# Altium PCB 001-03 ПП.PcbDoc
Units mm, origin at the board's own origin, x right, y up, seen from the top; angles counter-clockwise.
Board outline 91 x 91 mm, 4 copper layers (TOP, INT1, INT2, BOT), stack 1.131 mm thick; 32 components, 30 nets, 70 pads, 32 vias.
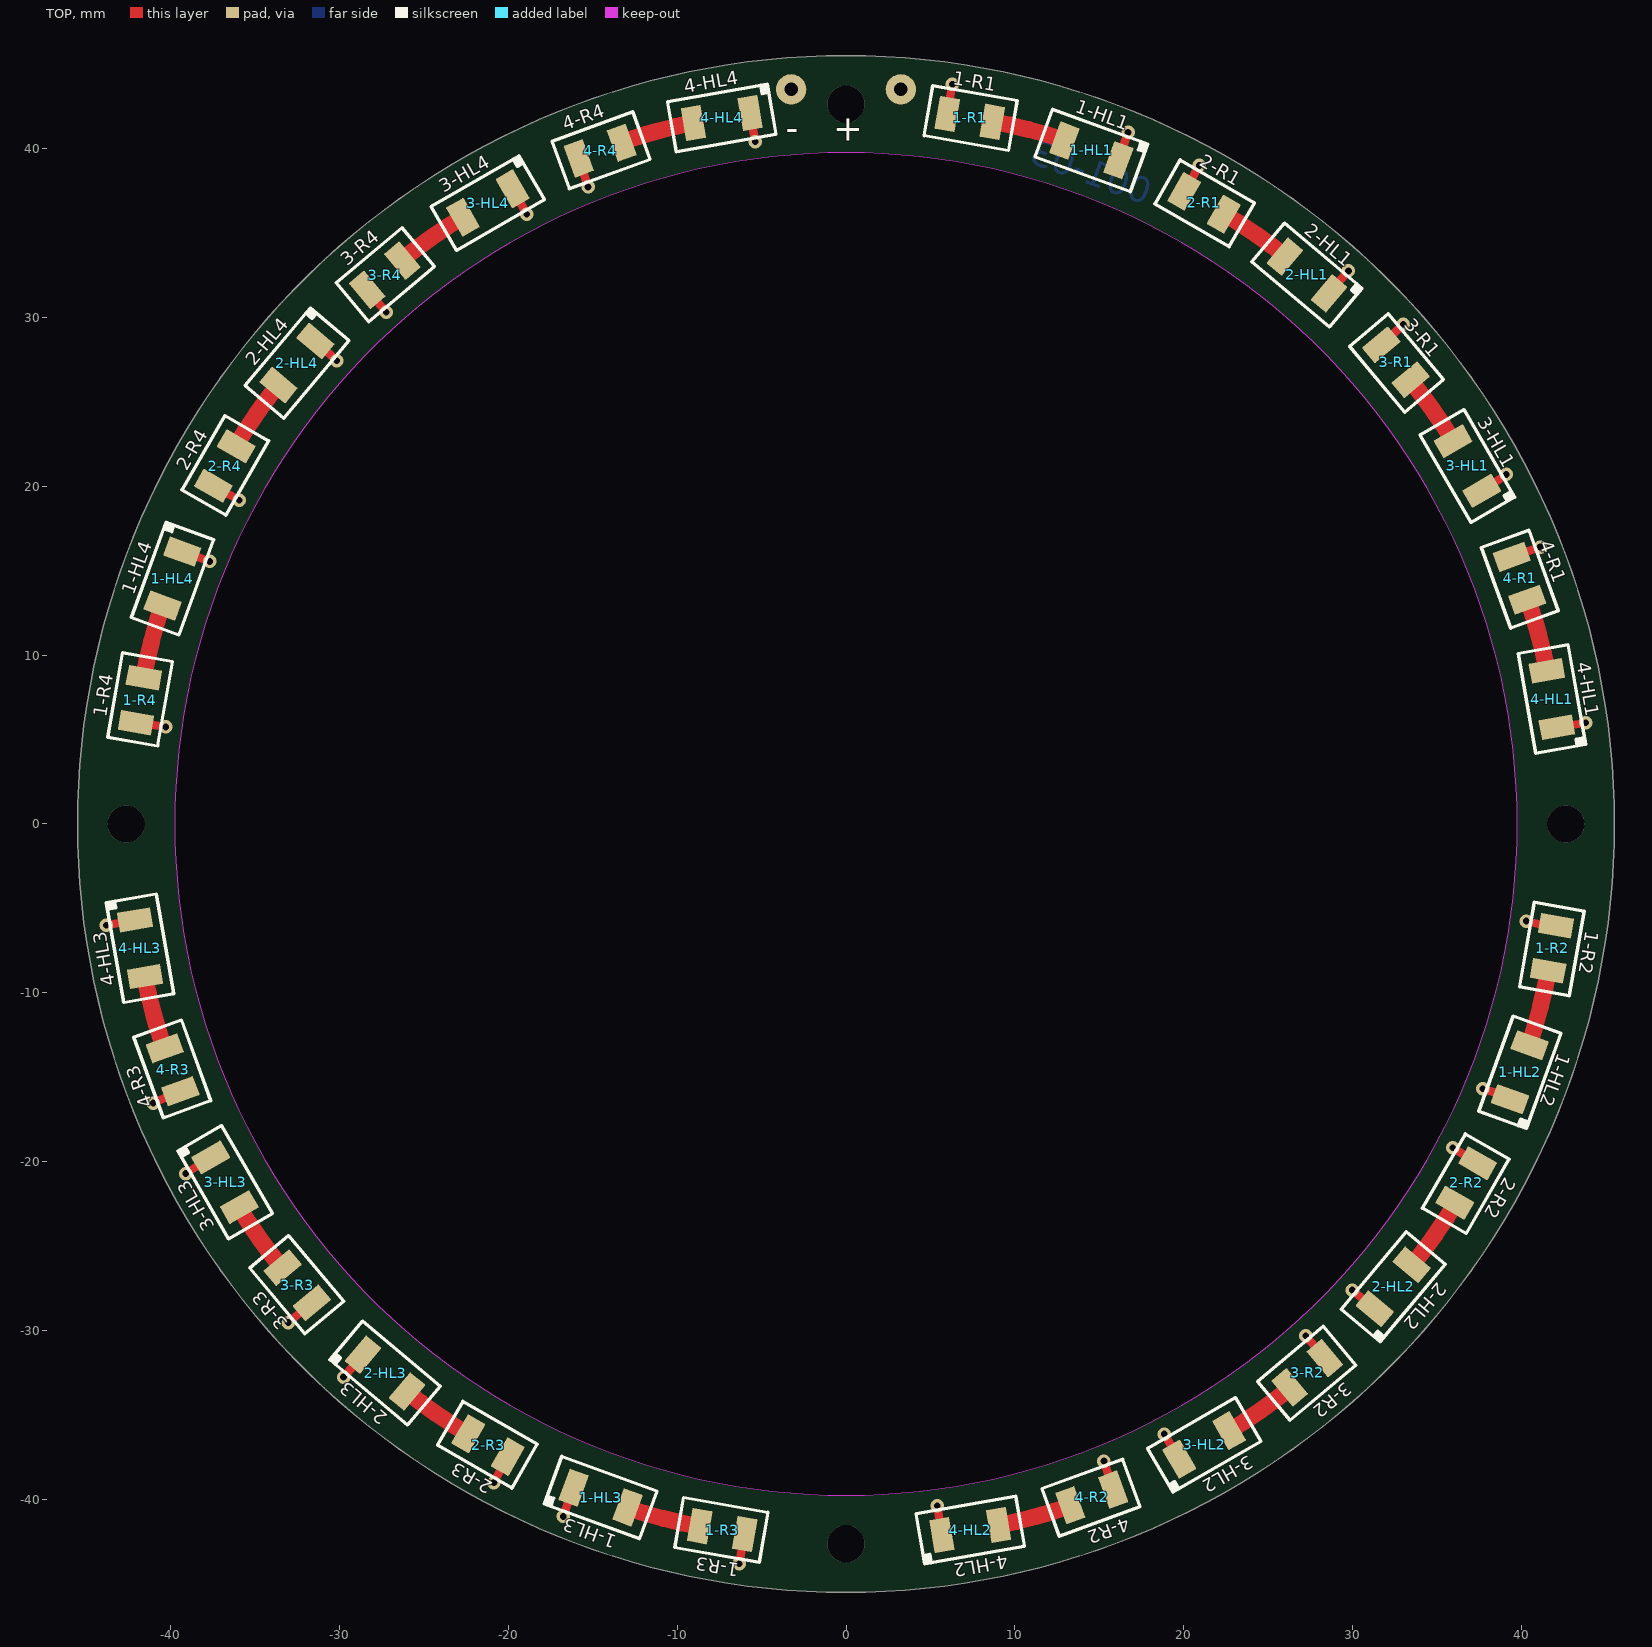
[diagram p0: TOP view]
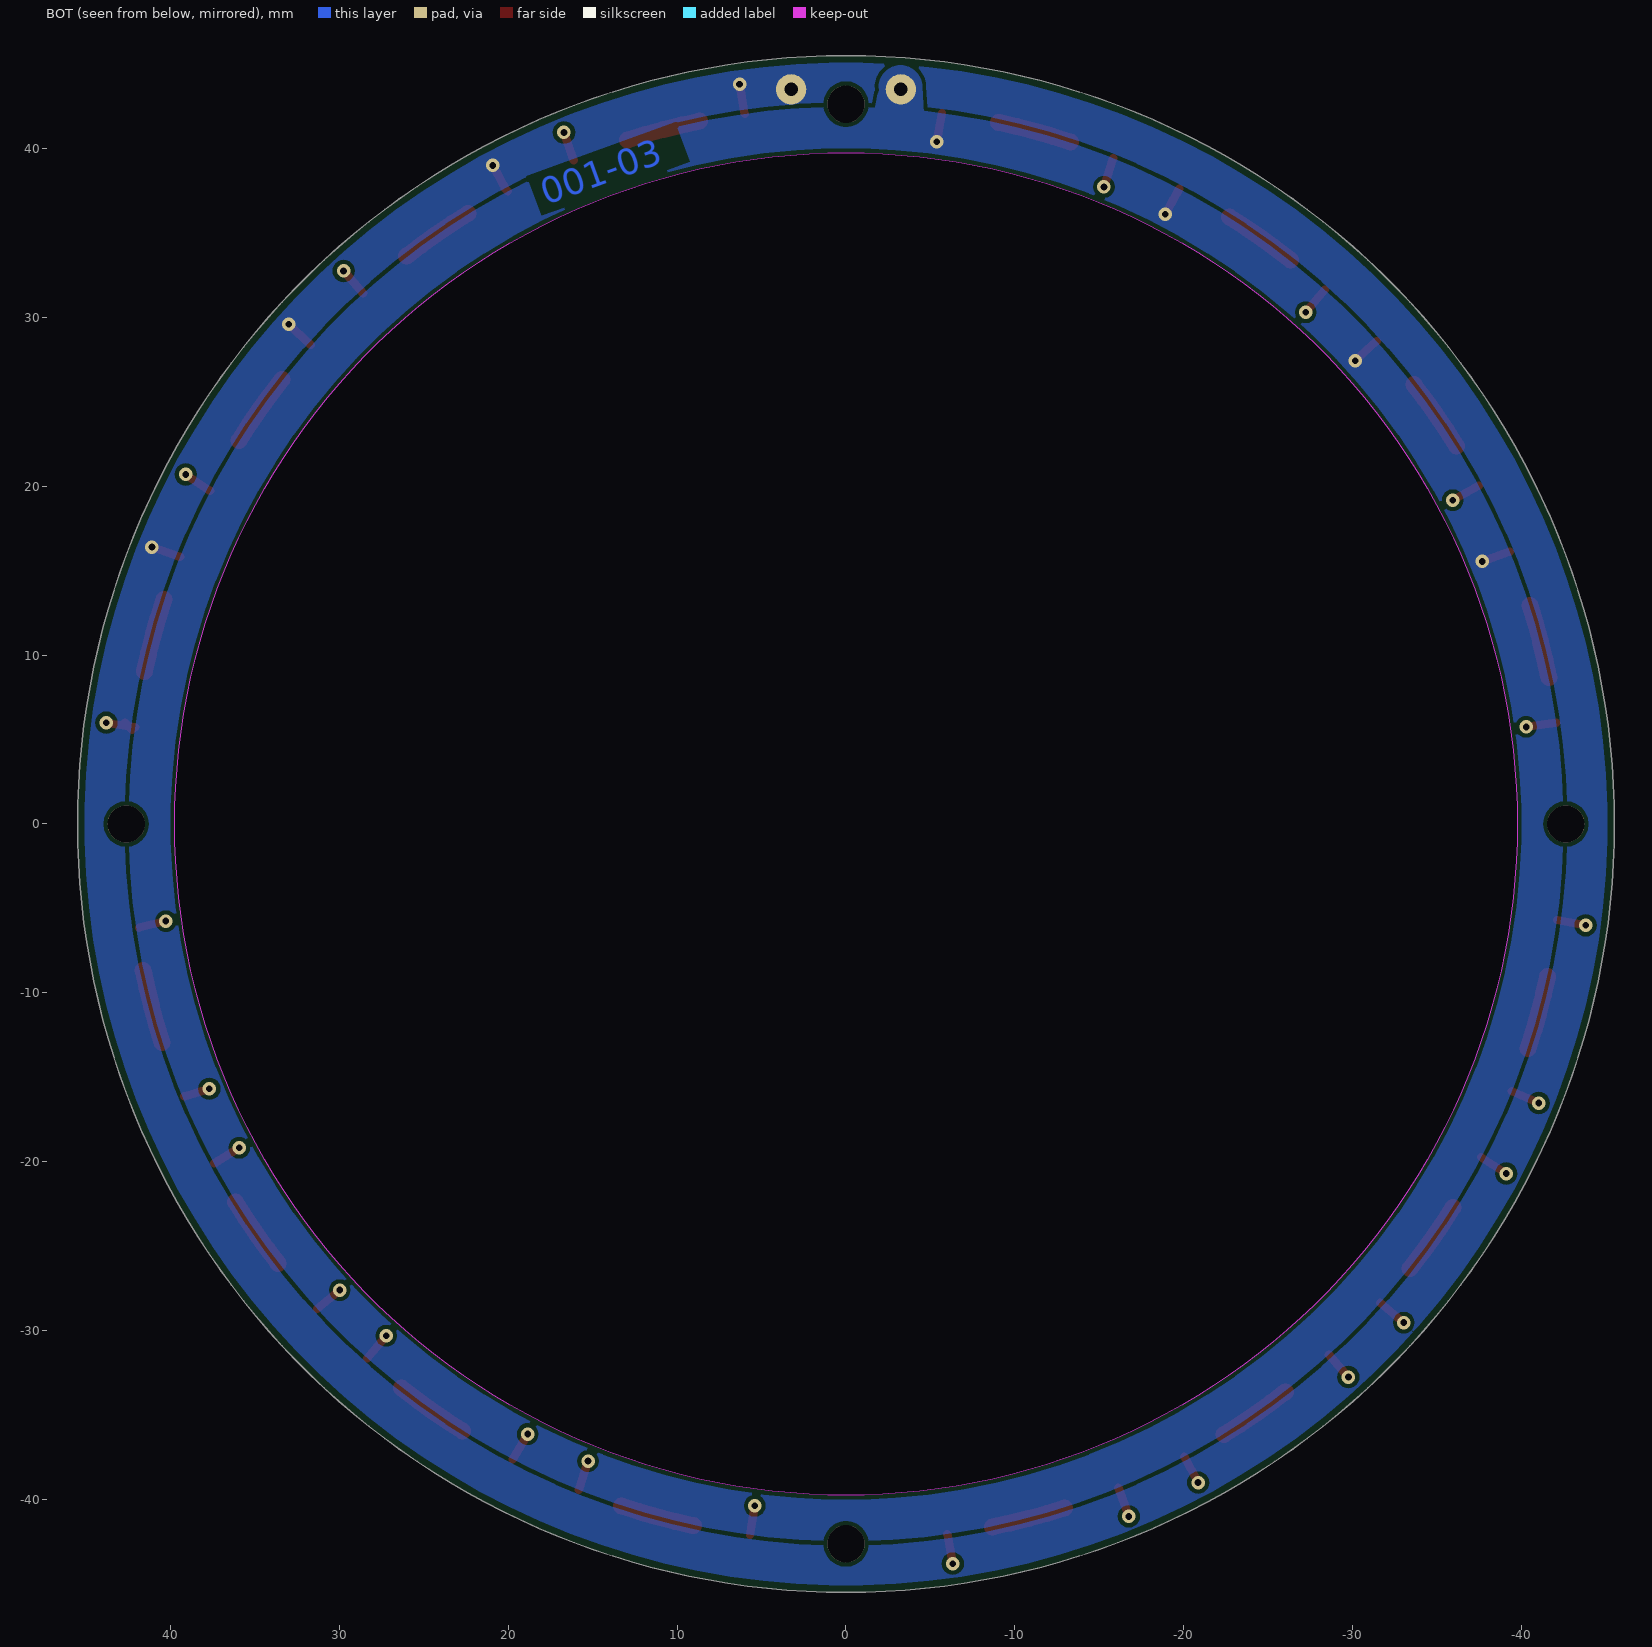
[diagram p1: BOT view, seen from below]
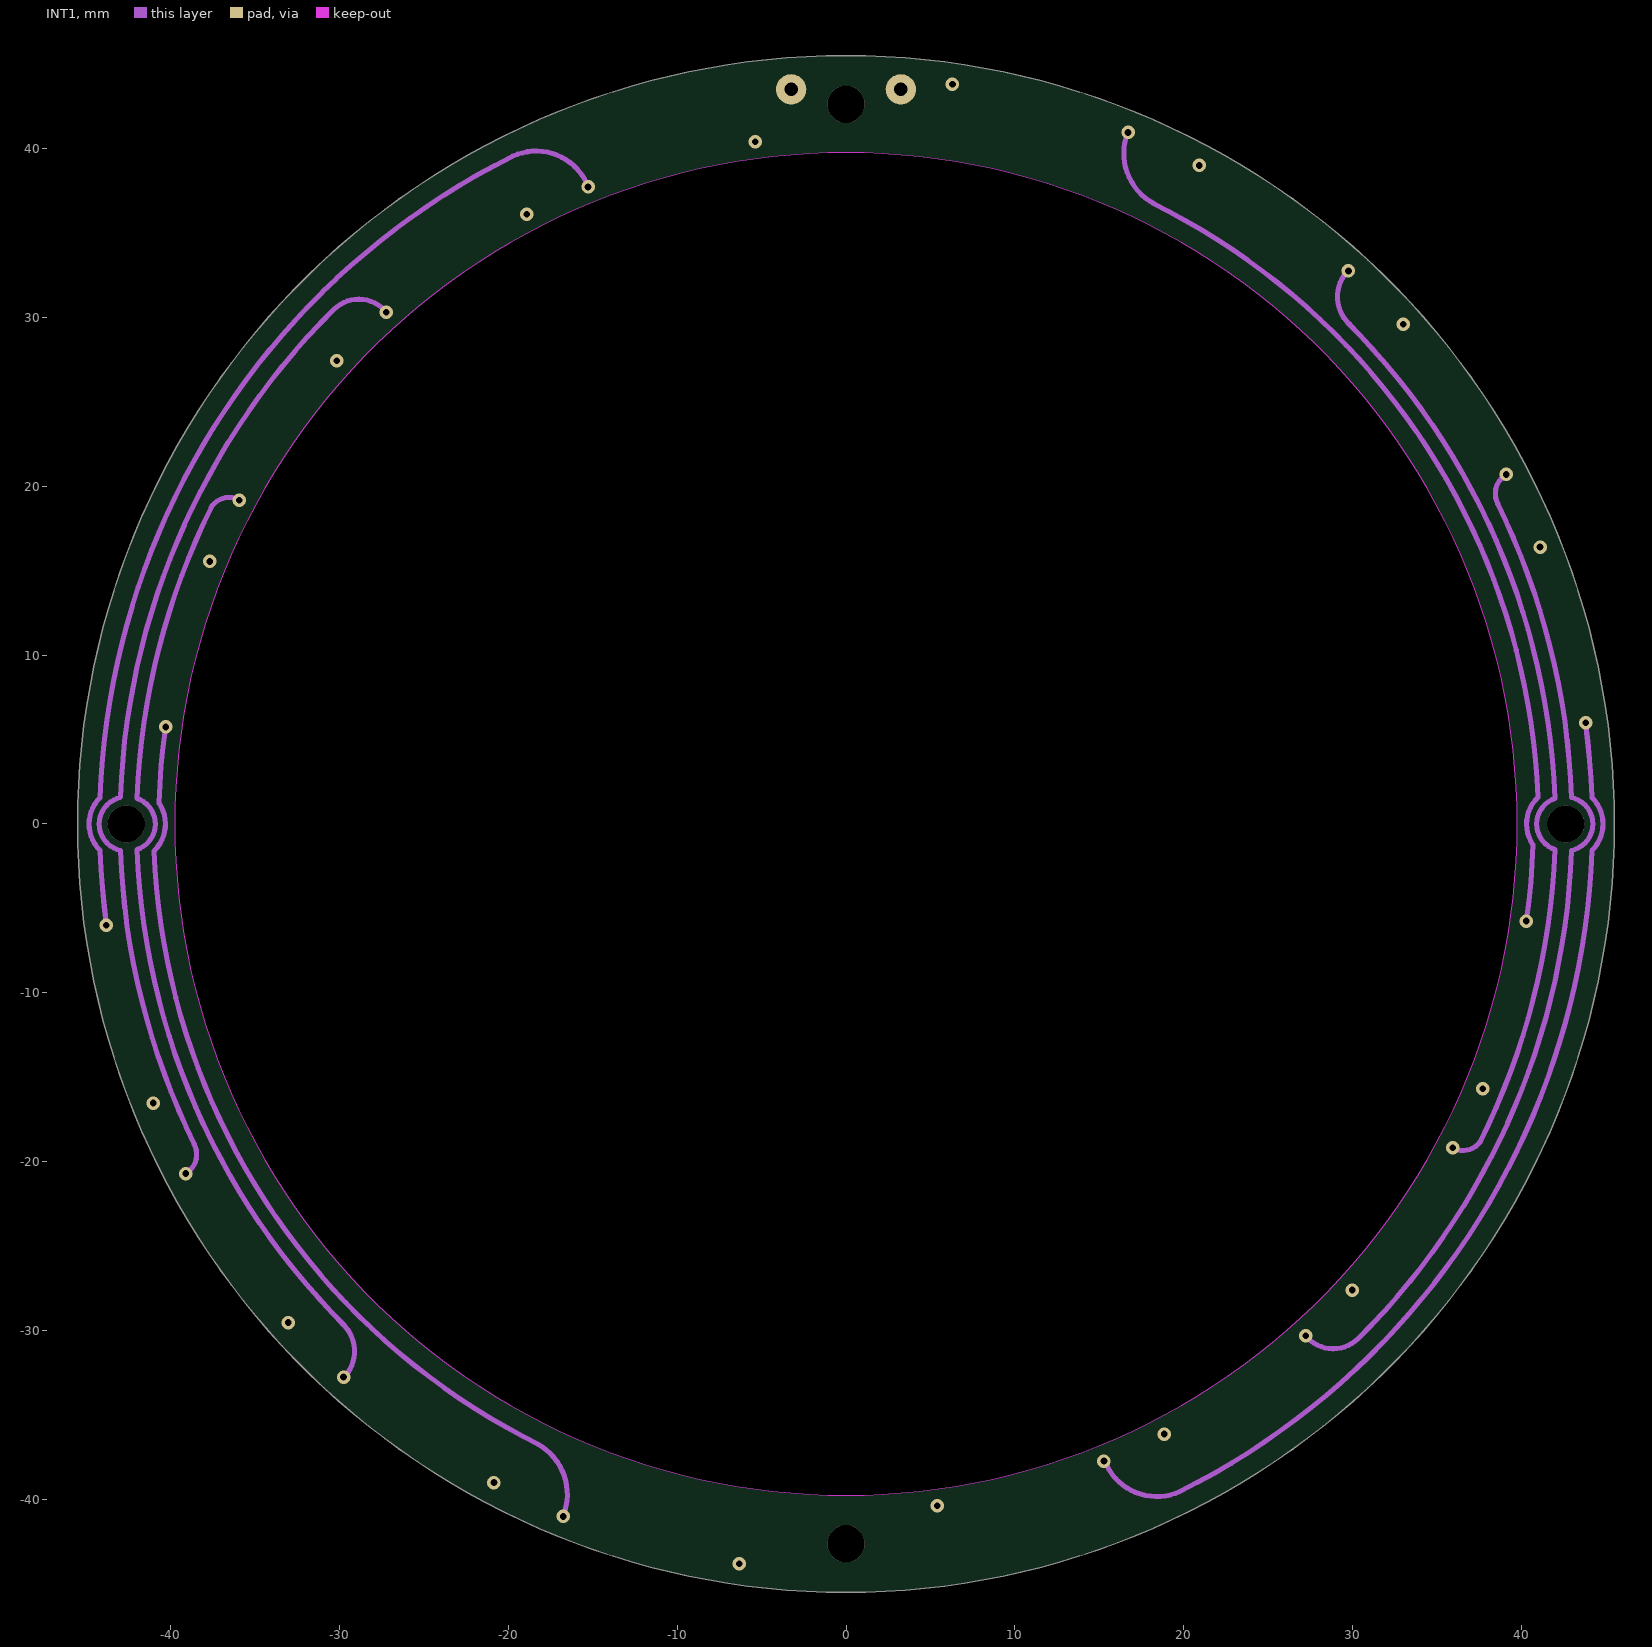
[diagram p2: INT1]
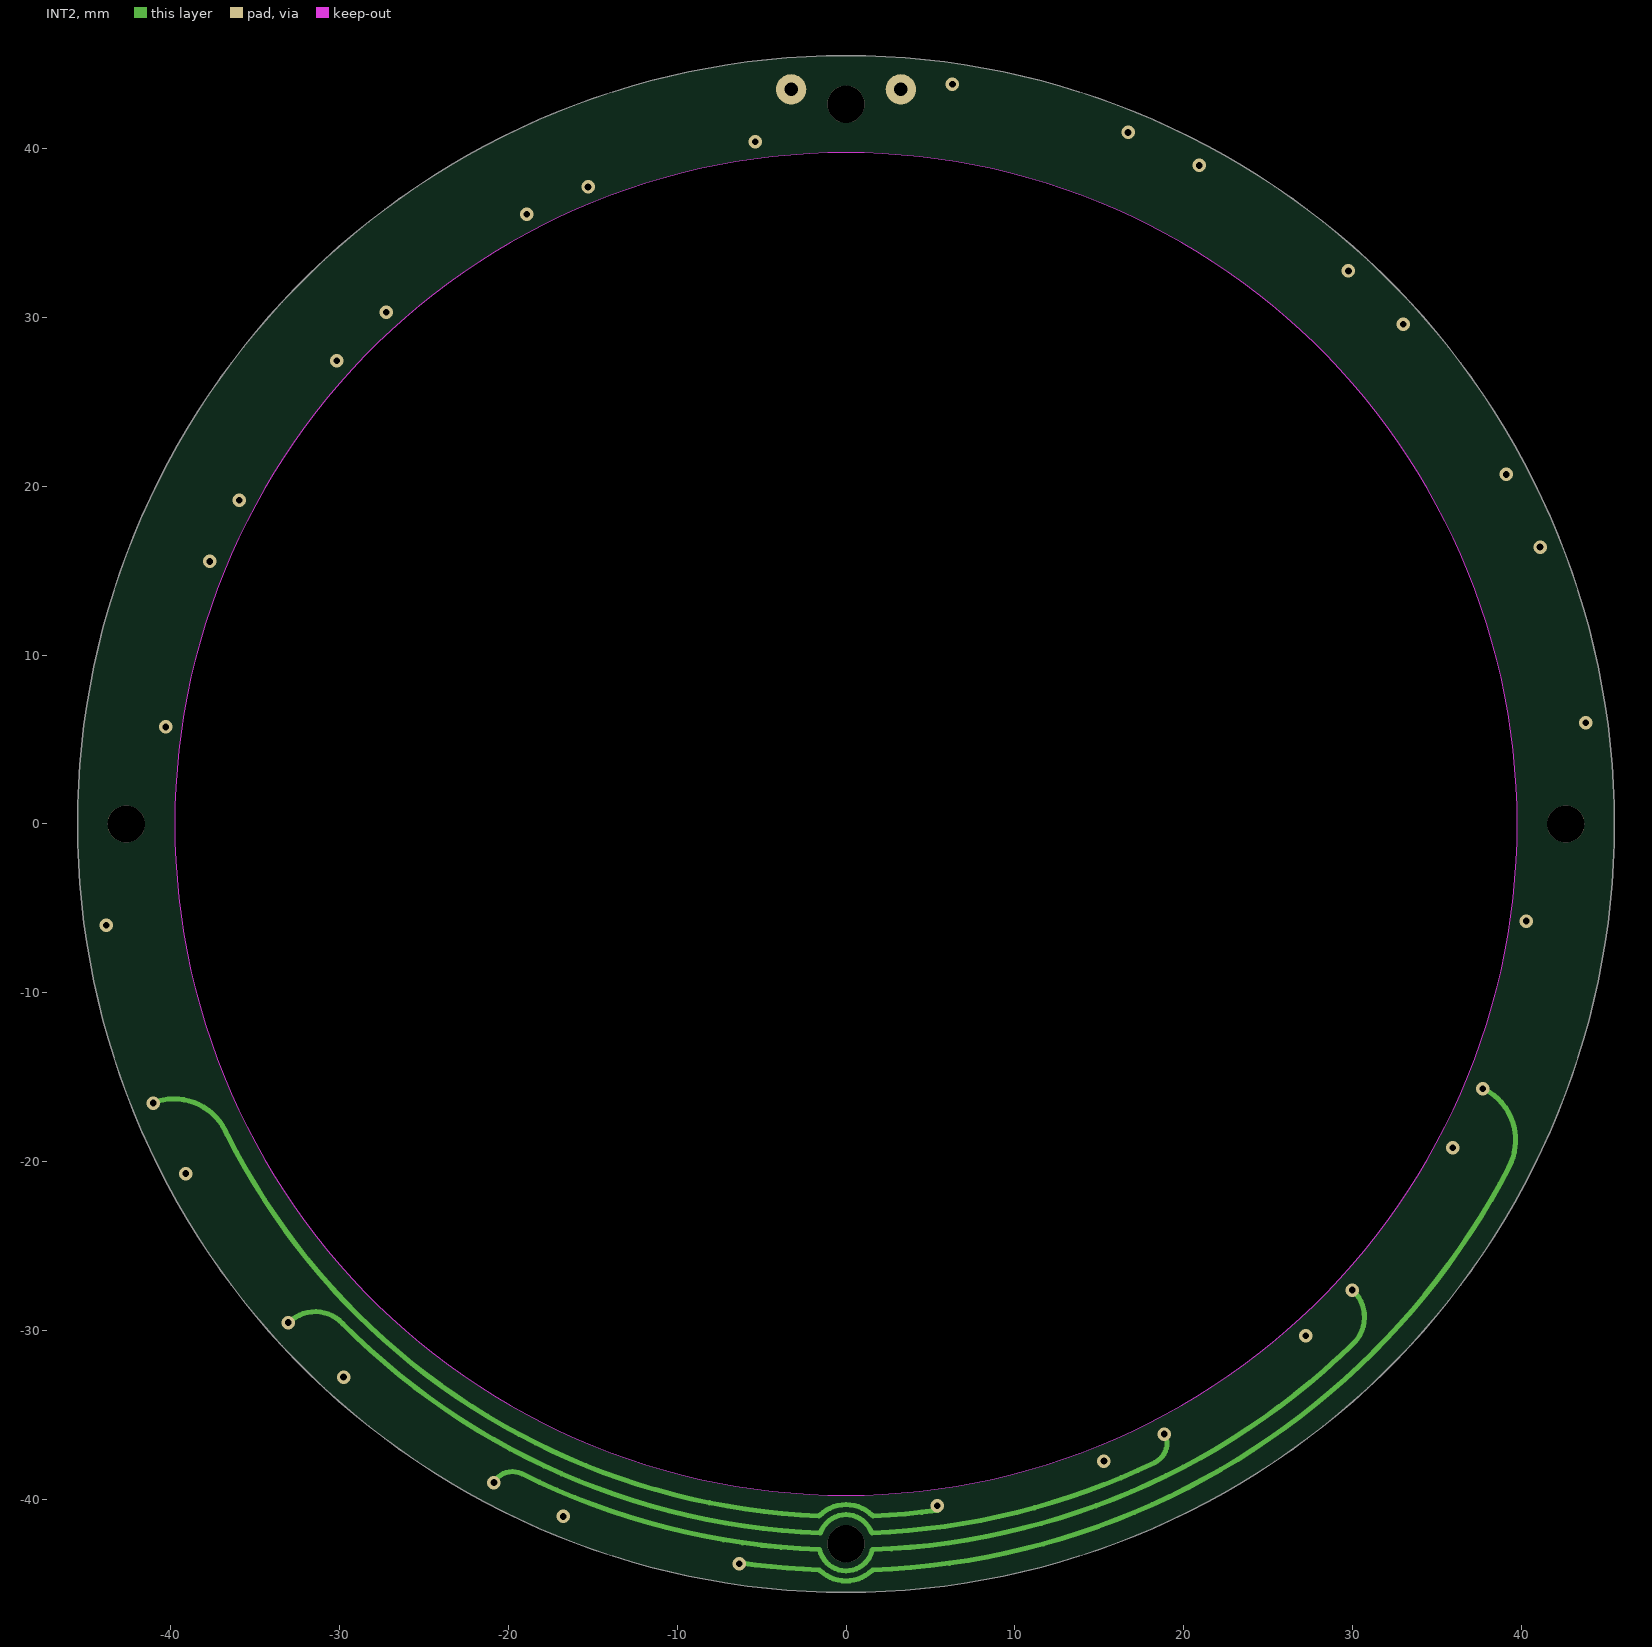
[diagram p3: INT2]
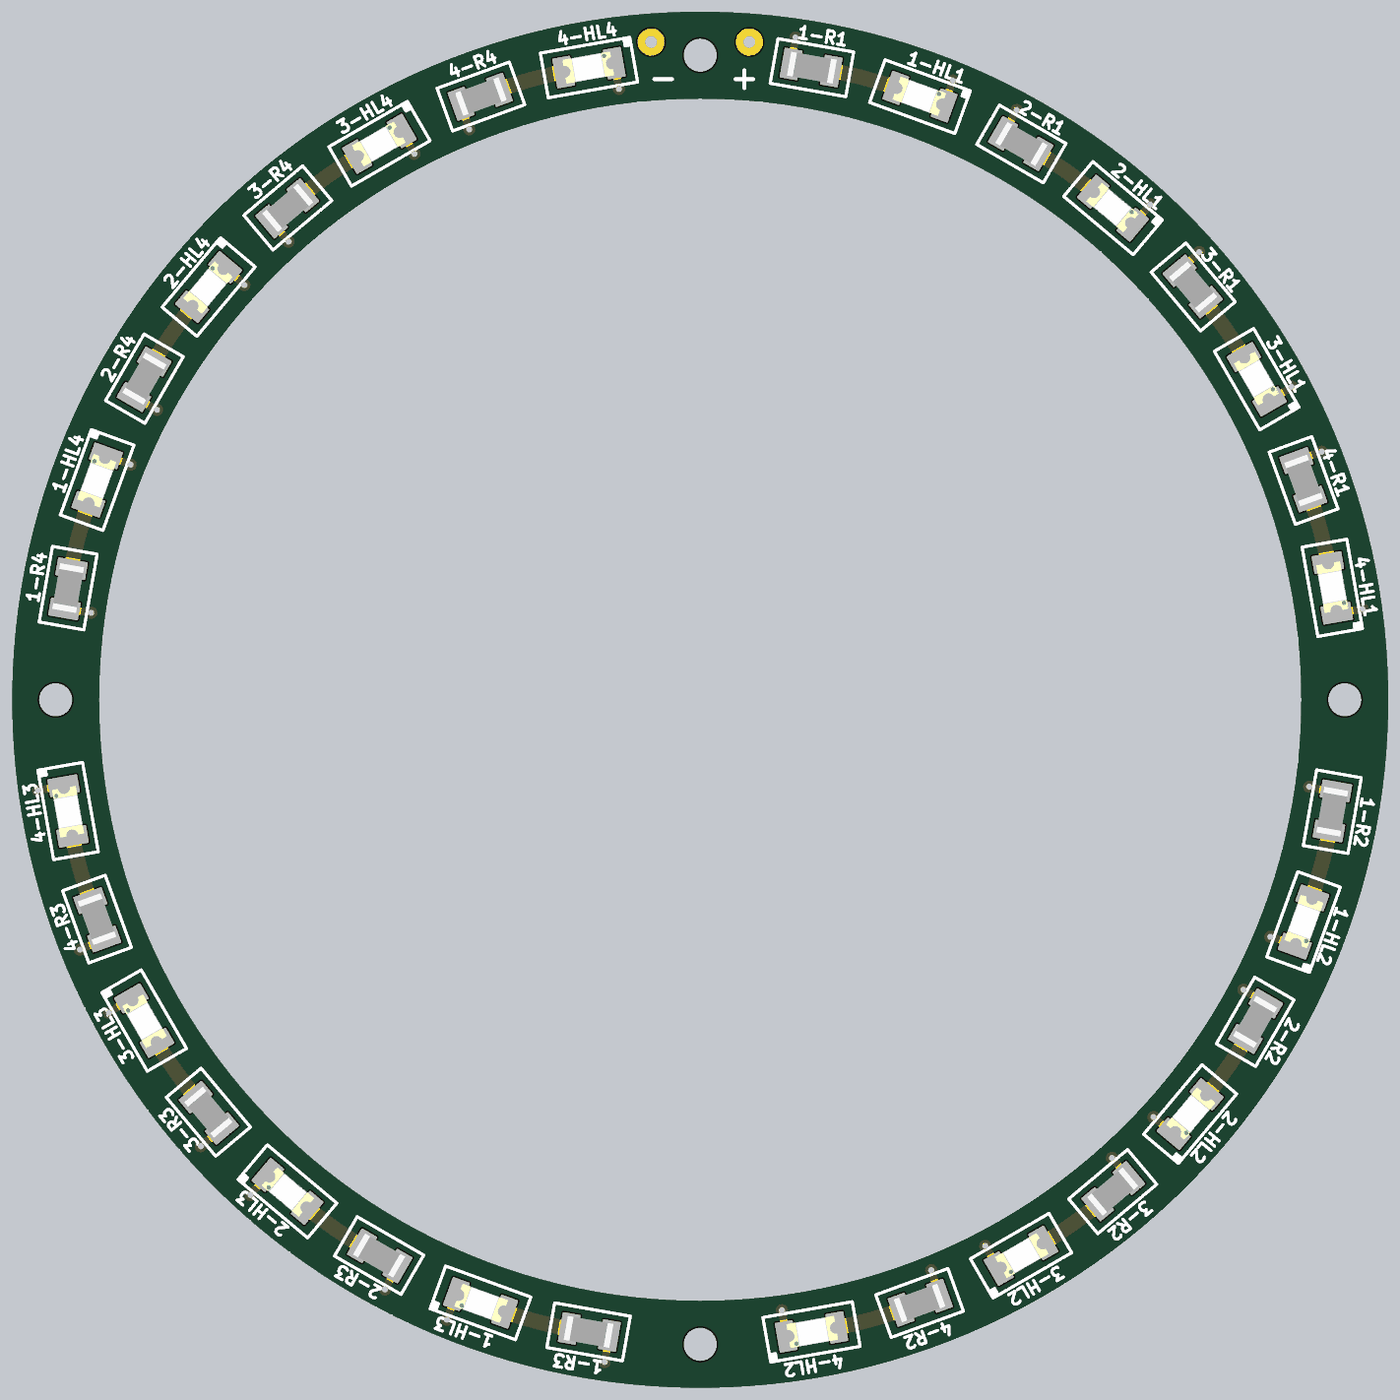
[diagram p4: 3D render of the assembled board from above, using the file's embedded part models]

## Layer stack, top to bottom
TOPSLD: solder mask 0.0102, Solder Resist, Dk 3.5
TOP: signal copper 0.0356
Dielectric 2: prepreg 0.33, PP-006, Dk 4.1
INT1: signal copper 0.035
Dielectric 1: dielectric 0.33, FR-4, Dk 4.8
INT2: signal copper 0.035
Dielectric 3: prepreg 0.33, PP-006, Dk 4.1
BOT: signal copper 0.0356
BOTSLD: solder mask 0.0102, Solder Resist, Dk 3.5

## Board outline
-45.5,0 ccw(c0,0) 0,-45.5 ccw(c0,0) 45.5,0 ccw(c0,0) 0,45.5 ccw(c0,0)
cut-out: -39.75,0 ccw(c0,0) 0,-39.75 ccw(c0,0) 39.75,0 ccw(c0,0) 0,39.75 ccw(c0,0)

## Design rules (kind name [scope] priority, off if disabled: settings)
Clearance [All] p1: gap=0.25 ignorepadtopadclearanceinfootprint=FALSE
PlaneConnect [All] p1: planeconnectstyle=Direct reliefexpansion=0.508 reliefentries=4 reliefconductorwidth=0.254 reliefairgap=0.254
PolygonConnect [All] p1: connectstyle=Direct reliefconductorwidth=0.5 reliefentries=4 polygonreliefangle="90 Angle" airgapwidth=0.3
RoutingVias [All] p1: holewidth=0.4 width=0.8 viastyle="Through Hole" minholewidth=0.4 minwidth=0.8 maxholewidth=0.8 maxwidth=1.5
SolderMaskExpansion [All] p1: expansion=0.102
Width [All] p1: maxlimit=1 minlimit=0.2 preferedwidth=0.5
29 further rules are at their usual default settings.

## Components (designator, comment, footprint, x,y, rotation, side; value= is the part's Value field where it differs from the comment)
1-HL1 "FYLS-1206UWC" "LED 1206" 14.532,39.885 r340 top value=3K*
1-HL2 "FYLS-1206UWC" "LED 1206" 39.9,-14.7 r250 top value=3K*
1-HL3 "FYLS-1206UWC" "LED 1206" -14.532,-39.885 r160 top value=3K*
1-HL4 "FYLS-1206UWC" "LED 1206" -39.885,14.532 r70 top value=3K*
1-R1 "*" RC1206 7.385,41.803 r350 top value=3K*
1-R2 "*" RC1206 41.8,-7.4 r260 top value=3K*
1-R3 "*" RC1206 -7.385,-41.803 r170 top value=3K*
1-R4 "*" RC1206 -41.803,7.385 r80 top value=3K*
2-HL1 "FYLS-1206UWC" "LED 1206" 27.297,32.51 r320 top value=3K*
2-HL2 "FYLS-1206UWC" "LED 1206" 32.4,-27.4 r230 top value=3K*
2-HL3 "FYLS-1206UWC" "LED 1206" -27.297,-32.511 r140 top value=3K*
2-HL4 "FYLS-1206UWC" "LED 1206" -32.511,27.297 r50 top value=3K*
2-R1 "*" RC1206 21.237,36.756 r330 top value=3K*
2-R2 "*" RC1206 36.7,-21.3 r240 top value=3K*
2-R3 "*" RC1206 -21.237,-36.757 r150 top value=3K*
2-R4 "*" RC1206 -36.757,21.237 r60 top value=3K*
3-HL1 "FYLS-1206UWC" "LED 1206" 36.8,21.2 r300 top value=3K*
3-HL2 "FYLS-1206UWC" "LED 1206" 21.213,-36.77 r210 top value=3K*
3-HL3 "FYLS-1206UWC" "LED 1206" -36.771,-21.214 r120 top value=3K*
3-HL4 "FYLS-1206UWC" "LED 1206" -21.215,36.77 r30 top value=3K*
3-R1 "*" RC1206 32.6,27.3 r310 top value=3K*
3-R2 "*" RC1206 27.276,-32.527 r220 top value=3K*
3-R3 "*" RC1206 -32.528,-27.277 r130 top value=3K*
3-R4 "*" RC1206 -27.277,32.528 r40 top value=3K*
4-HL1 "FYLS-1206UWC" "LED 1206" 41.8,7.4 r280 top value=3K*
4-HL2 "FYLS-1206UWC" "LED 1206" 7.358,-41.807 r190 top value=3K*
4-HL3 "FYLS-1206UWC" "LED 1206" -41.807,-7.358 r100 top value=3K*
4-HL4 "FYLS-1206UWC" "LED 1206" -7.358,41.807 r10 top value=3K*
4-R1 "*" RC1206 39.9,14.5 r290 top value=3K*
4-R2 "*" RC1206 14.506,-39.895 r200 top value=3K*
4-R3 "*" RC1206 -39.895,-14.506 r110 top value=3K*
4-R4 "*" RC1206 -14.506,39.895 r20 top value=3K*

## Footprints (in the part's own frame and the unit in brackets; to place one, negate y for a bottom-side part, rotate by r counter-clockwise, add the part's x,y. Pads: shape width x height; smd on the part's side, far side on the other; paste and mask are expansions set on the pad)
"LED 1206" [mm] "Chip Resistor, 2-Leads, Body 6,30x3,20mm, IPC Low Density"
  rrect10% 1.2x2 smd: 1(-1.7,0) 2(1.7,0)
  silkscreen extent -3,-1.5 3,1.5, body extent -1.65,-0.79 1.55,0.81, height 1.1
RC1206 [mm] "Chip Resistor, 2-Leads, Body 6,30x3,20mm, IPC Low Density"
  rrect10% 1.2x2 smd: 1(-1.4,0) 2(1.3,0)
  silkscreen extent -2.54,-1.5 2.54,1.5, body extent -1.53,-0.8 1.53,0.8, height 0.5

## Part data
1-HL1 1-HL2 1-HL3 1-HL4 2-HL1 2-HL2 2-HL3 2-HL4 3-HL1 3-HL2 3-HL3 3-HL4 4-HL1 4-HL2 4-HL3 4-HL4: library part LED, "Светодиод", Manufacturer=3K*, ManufacturerPartNumber=3K*, Part Number=3K*, Power/Voltage=3K*, Rem=3K*, TKE=3K*, Tolerance=3K*, Корпус=3K*, Примечание=3K*
1-R1 1-R2 1-R3 1-R4 2-R1 2-R2 2-R3 2-R4 3-R1 3-R2 3-R3 3-R4 4-R1 4-R2 4-R3 4-R4: library part RES, "Постоянный углеродистый резистор", Manufacturer=3K*, ManufacturerPartNumber=3K*, Part Number=3K*, Power/Voltage=3K*, Rem=3K*, TKE=3K*, Tolerance=3K*, Type=3K*

## Free pads (board coordinates)
  round 1.8 hole 0.8: 8(-3.25,43.5) 8(3.25,43.5)
  round 2.2 hole 2.2 unplated: MH(-42.625,0) MH(0,-42.625) MH(0,42.625) MH(42.625,0)

## Via types
v1: diameter 0.8, hole 0.4, TOP to BOT, tented both sides, 32 vias

## Nets (pads, with @x,y where several pads share a name; then routed paths per layer and width w, separated by ;. In a path a pad name is that pad's centre, name@x,y a point inside that pad or via, vN(x,y) a via of type N, cw(c..) or ccw(c..) an arc to the next point about the centre after c; other vN are vias at no path point)
L+: 1-R1.1 2-R1.1 3-R1.1 4-R1.1 pad.8@3.25,43.5 | length 7.3
  TOP w0.5: 1-R1.1 v1(6.3,43.8) ; 2-R1.1 2-R1.1@20.2,37.631 ; 2-R1.1@20.112,37.544 v1(20.925,39) ; 3-R1.1 v1(33,29.6) ; 4-R1.1 v1(41.1,16.4)
L-: 1-HL4.2 2-HL4.2 3-HL4.2 4-HL4.2 pad.8@-3.25,43.5 | length 6.9
  TOP w0.5: 1-HL4.2 v1(-37.675,15.55) ; 2-HL4.2 v1(-30.15,27.425) ; 3-HL4.2 v1(-18.9,36.1) ; 4-HL4.2 v1(-5.375,40.4)
Net1-HL1_1: 1-HL1.1 1-R1.2 | length 4.4
  TOP w1: 1-R1.2@8.675,41.626 cw(c0,0) 1-HL1.1@12.945,40.502
Net1-HL1_2: 1-HL1.2 1-R2.1 | length 59.8
  TOP w0.5: 1-HL1.2 v1(16.7,40.95) ; v1(40.275,-5.75) 1-R2.1@41.858,-6.134
  INT1 w0.3: v1@16.696,40.995 ccw(c19.85,39.725) 18.23,36.736 ; 18.155,36.761 cw(c0,0) 40.969,1.6 ; v1@40.307,-5.646 ccw(c0,0) 40.682,-1.225 ; 40.673,-1.226 cw(c42.5,0) 40.968,1.579
Net1-HL2_1: 1-HL2.1 1-R2.2 | length 4.4
  TOP w1: 1-HL2.1@40.502,-12.945 ccw(c0,0) 1-R2.2@41.626,-8.675
Net1-HL2_2: 1-HL2.2 1-R3.1 | length 63.6
  TOP w0.5: v1(-6.325,-43.8) 1-R3.1 ; v1(37.7,-15.675) 1-HL2.2@39.175,-16.125
  INT2 w0.3: v1@-6.317,-43.746 ccw(c0,0) -1.575,-44.172 ; -1.542,-44.194 ccw(c0,-42.625) 1.542,-44.194 ; 1.575,-44.172 ccw(c0,0) 39.266,-20.293 ; v1@37.87,-15.736 cw(c36.25,-18.725) 39.242,-20.34
Net1-HL3_1: 1-HL3.1 1-R3.2 | length 4.4
  TOP w1: 1-HL3.1@-12.945,-40.502 ccw(c0,0) 1-R3.2@-8.675,-41.626
Net1-HL3_2: 1-HL3.2 1-R4.1 | length 60
  TOP w0.5: 1-R4.1 v1(-40.275,5.75) ; v1(-16.75,-41) 1-HL3.2
  INT1 w0.3: -40.969,-1.6 ccw(c0,0) -18.155,-36.761 ; -40.956,-1.567 ccw(c-42.5,0) -40.673,1.226 ; -40.681,1.25 cw(c0,0) v1@-40.307,5.646 ; -18.28,-36.711 cw(c-19.9,-39.7) v1@-16.746,-40.97
Net1-HL4_1: 1-HL4.1 1-R4.2 | length 4.4
  TOP w1: 1-R4.2@-41.626,8.675 cw(c0,0) 1-HL4.1@-40.502,12.945
Net2-HL1_1: 2-HL1.1 2-R1.2 | length 4.4
  TOP w1: 2-R1.2@22.389,36.149 cw(c0,0) 2-HL1.1@26.017,33.632
Net2-HL1_2: 2-HL1.2 2-R2.1 | length 62.5
  TOP w0.5: 2-HL1.2 v1(29.75,32.75) ; v1(35.925,-19.175) 2-R2.1
  INT1 w0.254: v1@29.674,32.701 29.733,32.766 v1@29.763,32.799
  INT1 w0.3: v1@29.663,32.695 ccw(c31.3,31.225) 29.848,29.572 ; 29.698,29.698 cw(c0,0) 41.972,1.525 ; v1@35.866,-19.151 ccw(c36.528,-18.087) 37.554,-18.807 ; 37.533,-18.848 ccw(c0,0) 37.554,-18.807 ; 37.599,-18.738 cw(c36.528,-18.087) 37.554,-18.807 ; 41.963,-1.507 cw(c42.5,0) 41.97,1.51 ; 41.972,-1.525 cw(c0,0) 37.554,-18.807
Net2-HL2_1: 2-HL2.1 2-R2.2 | length 4.4
  TOP w1: 2-HL2.1@33.632,-26.017 ccw(c0,0) 2-R2.2@36.149,-22.389
Net2-HL2_2: 2-HL2.2 2-R3.1 | length 63
  TOP w0.5: v1(-20.85,-39) 2-R3.1 ; v1(29.975,-27.6) 2-HL2.2
  INT2 w0.3: v1@-20.917,-39.145 cw(c-19.75,-39.6) -19.21,-38.47 ; -19.185,-38.483 ccw(c0,0) -1.575,-42.971 ; -1.559,-42.983 ccw(c0,-42.625) 1.554,-43.007 ; 1.575,-42.971 ccw(c0,0) 29.979,-30.826 ; 29.983,-30.825 ccw(c28.5,-29.2) v1@30.217,-27.824
Net2-HL3_1: 2-HL3.1 2-R3.2 | length 4.4
  TOP w1: 2-HL3.1@-26.017,-33.632 ccw(c0,0) 2-R3.2@-22.389,-36.149
Net2-HL3_2: 2-HL3.2 2-R4.1 | length 62.3
  TOP w0.5: 2-R4.1 v1@-35.975,19.2 ; v1(-29.75,-32.75) 2-HL3.2
  INT1 w0.3: -41.972,-1.525 ccw(c0,0) -29.698,-29.698 ; -41.972,1.525 cw(c0,0) -37.533,18.848 ; -41.97,-1.51 ccw(c-42.5,0) -41.963,1.507 ; -37.599,18.738 cw(c-36.528,18.088) v1@-35.866,19.151 ; -29.848,-29.572 cw(c-31.3,-31.225) v1@-29.663,-32.695
  other v1: -35.925,19.175
Net2-HL4_1: 2-HL4.1 2-R4.2 | length 4.4
  TOP w1: 2-R4.2@-36.149,22.389 cw(c0,0) 2-HL4.1@-33.632,26.017
Net3-HL1_1: 3-HL1.1 3-R1.2 | length 4.4
  TOP w1: 3-R1.2@33.403,26.311 cw(c0,0) 3-HL1.1@35.951,22.705
Net3-HL1_2: 3-HL1.2 3-R2.1 | length 63.7
  TOP w0.5: v1(27.225,-30.3) 3-R2.1 ; 3-HL1.2 v1(39.1,20.7)
  INT1 w0.2: v1@39.143,20.619 v1@39.178,20.637
  INT1 w0.254: v1@39.178,20.637 v1@39.186,20.641
  INT1 w0.3: v1@27.197,-30.27 ccw(c28.85,-28.975) 30.335,-30.46 ; 30.377,-30.427 ccw(c-0.004,0.003) 42.966,-1.6 ; 38.586,18.966 cw(c-0.005,0) 42.966,1.575 ; 38.601,18.973 cw(c39.7,19.575) v1@39.11,20.68 ; 42.972,-1.562 ccw(c42.625,0) 42.972,1.562
Net3-HL2_1: 3-HL2.1 3-R2.2 | length 4.4
  TOP w1: 3-HL2.1@22.705,-35.951 ccw(c0,0) 3-R2.2@26.311,-33.403
Net3-HL2_2: 3-HL2.2 3-R3.1 | length 61.8
  TOP w0.5: v1(-33.025,-29.525) 3-R3.1 ; v1(18.85,-36.125) 3-HL2.2
  INT2 w0.3: v1@-32.801,-29.358 cw(c-31.425,-31.075) -29.8,-29.592 ; -29.803,-29.594 ccw(c0,0) -1.525,-41.972 ; -1.505,-41.957 cw(c0,-42.5) 1.505,-41.957 ; 1.528,-41.972 ccw(c0,0) 18.271,-37.817 ; 18.268,-37.816 ccw(c17.75,-36.675) v1@18.849,-36.073
Net3-HL3_1: 3-HL3.1 3-R3.2 | length 4.4
  TOP w1: 3-HL3.1@-35.951,-22.705 ccw(c0,0) 3-R3.2@-33.403,-26.311
Net3-HL3_2: 3-HL3.2 3-R4.1 | length 63.6
  TOP w0.5: v1(-39.1,-20.7) 3-HL3.2 ; 3-R4.1 v1(-27.225,30.3)
  INT1 w0.3: -42.983,-1.559 cw(c-42.625,0) -42.983,1.559 ; -42.966,-1.575 ccw(c0.005,0) -38.586,-18.966 ; -42.966,1.6 cw(c0.004,-0.003) -30.377,30.427 ; v1@-39.11,-20.68 ccw(c-39.7,-19.575) -38.601,-18.973 ; -30.335,30.46 cw(c-28.85,28.975) v1@-27.197,30.27
Net3-HL4_1: 3-HL4.1 3-R4.2 | length 4.4
  TOP w1: 3-R4.2@-26.311,33.403 cw(c0,0) 3-HL4.1@-22.705,35.951
Net4-HL1_1: 4-HL1.1 4-R1.2 | length 4.4
  TOP w1: 4-R1.2@40.387,13.3 cw(c0,0) 4-HL1.1@41.549,9.04
Net4-HL1_2: 4-HL1.2 4-R2.1 | length 64.7
  TOP w0.5: v1(15.275,-37.725) 4-R2.1 ; 4-HL1.2 v1@43.788,5.981 ; 4-HL1.2@42.275,5.575 4-HL1.2@42.7,6
  INT1 w0.2: v1@43.753,5.976 v1@43.834,5.988
  INT1 w0.3: v1@15.319,-37.708 ccw(c18.4,-36.525) 19.784,-39.521 ccw(c-0.005,0.001) 44.166,-1.6 ; v1@43.788,5.981 cw(c-0.005,0) 44.166,1.6 ; 44.182,-1.559 ccw(c42.627,-0.003) 44.182,1.553
  other v1: 43.8,6
Net4-HL2_1: 4-HL2.1 4-R2.2 | length 4.4
  TOP w1: 4-HL2.1@9.04,-41.549 ccw(c0,0) 4-R2.2@13.3,-40.387
Net4-HL2_2: 4-HL2.2 4-R3.1 | length 59.8
  TOP w0.5: v1(-41.025,-16.525) 4-R3.1 ; v1(5.4,-40.375) 4-HL2.2
  INT2 w0.3: v1@-41.048,-16.512 cw(c-39.8,-19.675) -36.64,-18.421 ; -36.606,-18.466 ccw(c0,0) -1.6,-40.969 ; -1.569,-40.957 cw(c0,-42.5) 1.569,-40.957 ; 1.601,-40.969 ccw(c0,0) v1@5.443,-40.637
Net4-HL3_1: 4-HL3.1 4-R3.2 | length 4.4
  TOP w1: 4-HL3.1@-41.549,-9.04 ccw(c0,0) 4-R3.2@-40.387,-13.3
Net4-HL3_2: 4-HL3.2 4-R4.1 | length 64.1
  TOP w0.5: v1(-43.8,-6) 4-HL3.2 ; 4-R4.1 v1(-15.275,37.725)
  INT1 w0.3: -44.181,-1.556 cw(c-42.625,0) -44.181,1.556 ; -44.167,-1.575 ccw(c0.005,0) v1@-43.788,-5.981 ; -44.167,1.575 cw(c0.005,-0.001) -19.784,39.522 ; -19.734,39.546 cw(c-18.35,36.55) v1@-15.269,37.733
Net4-HL4_1: 4-HL4.1 4-R4.2 | length 4.4
  TOP w1: 4-R4.2@-13.3,40.387 cw(c0,0) 4-HL4.1@-9.04,41.549

## Polygon pours and split planes (outlines as drawn)
L+ on BOT "BOT-L+" (solid, pour order 14): -45.075,0 ccw(c0,0) 0,-45.075 ccw(c0,0) 45.075,0 ccw(c0,0) 0,45.075 ccw(c0,0)
L- on BOT "GND" (solid, pour order 0): -42.466,0 ccw(c0,0) 0,-42.466 ccw(c0,0) 42.466,0 ccw(c0,0) 0,42.466 ccw(c0,0)
L- on BOT "BOT-L-" (solid, pour order 10): -4.636,41.475 -1.561,41.6 -1.886,43.25 cw(c-1.634,43.459) -1.944,43.564 ccw(c-3.182,43.645) -1.941,43.646 ccw(c-3.221,43.646) -4.501,43.646
no net on BOT "BOT-No Net" (none, pour order 6): -4.773,41.152

## Other copper
BOT:
  text "001-03" at 17.75,36.65 h1.52 r340

## Silkscreen, mask and mechanical layers (free items; w line width, h text height)
TOPOVR:
  text "1-R1" at 6.277,43.805 h0.8 r350.56
  text "4-HL4" at -9.532,43.265 h0.8 r10
  text "1-HL1" at 13.504,42.176 h0.8 r340
  text "4-R4" at -16.612,41.043 h0.8 r20
  text "-   +" at -3.563,40.447 h1.52
  text "2-R1" at 20.866,39.046 h0.8 r330
  text "3-HL4" at -23.829,37.349 h0.8 r30
  text "2-HL1" at 27.064,35.028 h0.8 r320
  text "3-R4" at -29.529,33.007 h0.8 r40
  text "3-R1" at 33.007,29.529 h0.8 r310
  text "2-HL4" at -35.028,27.064 h0.8 r50
  text "3-HL1" at 37.349,23.829 h0.8 r300
  text "2-R4" at -39.046,20.866 h0.8 r60
  text "4-R1" at 41.043,16.612 h0.8 r290
  text "1-HL4" at -42.176,13.504 h0.8 r70
  text "4-HL1" at 43.265,9.532 h0.8 r280
  text "1-R4" at -43.805,6.277 h0.8 r80.56
  text "1-R2" at 43.805,-6.277 h0.8 r260.56
  text "4-HL3" at -43.265,-9.532 h0.8 r100
  text "1-HL2" at 42.176,-13.504 h0.8 r250
  text "4-R3" at -41.043,-16.612 h0.8 r110
  text "2-R2" at 39.046,-20.866 h0.8 r240
  text "3-HL3" at -37.349,-23.829 h0.8 r120
  text "2-HL2" at 35.028,-27.064 h0.8 r230
  text "3-R3" at -33.007,-29.529 h0.8 r130
  text "3-R2" at 29.529,-33.007 h0.8 r220
  text "2-HL3" at -27.064,-35.028 h0.8 r140
  text "3-HL2" at 23.829,-37.349 h0.8 r210
  text "2-R3" at -20.866,-39.046 h0.8 r150
  text "4-R2" at 16.612,-41.043 h0.8 r200
  text "1-HL3" at -13.504,-42.176 h0.8 r160
  text "4-HL2" at 9.532,-43.265 h0.8 r190
  text "1-R3" at -6.277,-43.805 h0.8 r170.56
Mechanical 4:
  circle w0.1: c0,0 r39.75
  circle w0.1: c0,0 r45.5